# EAGLE board driver_board (EAGLE 9.1.3)
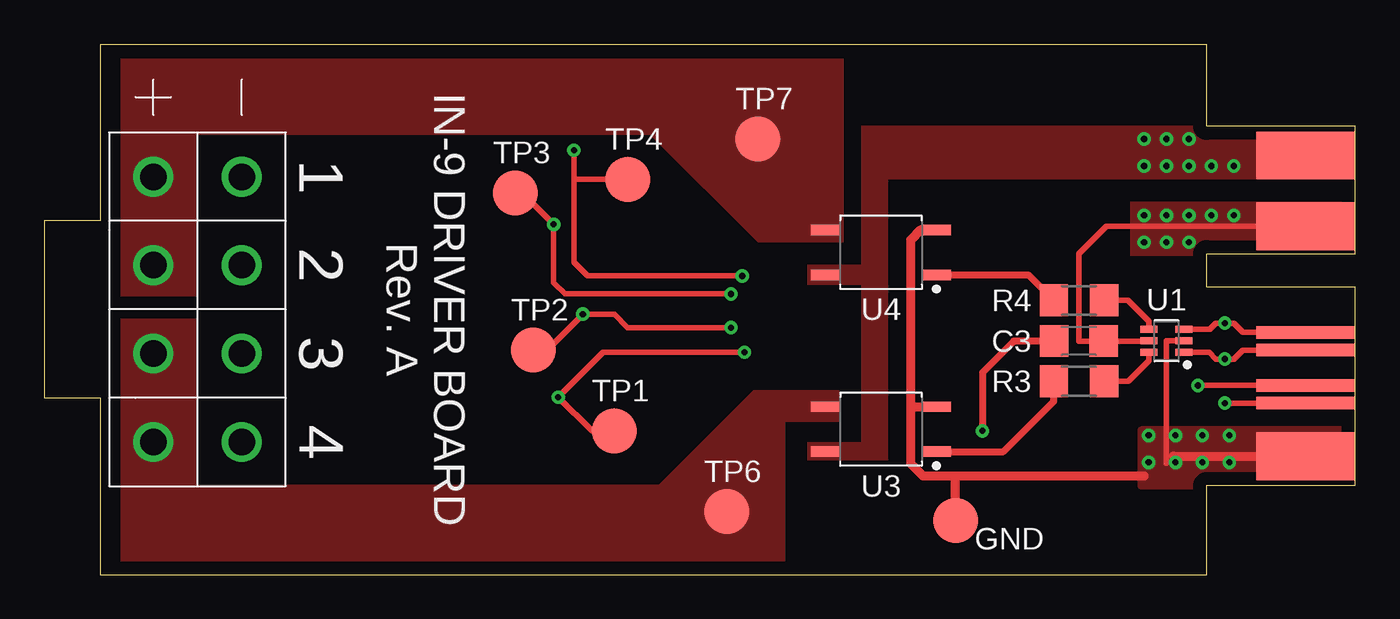
[diagram p0: board, top side]
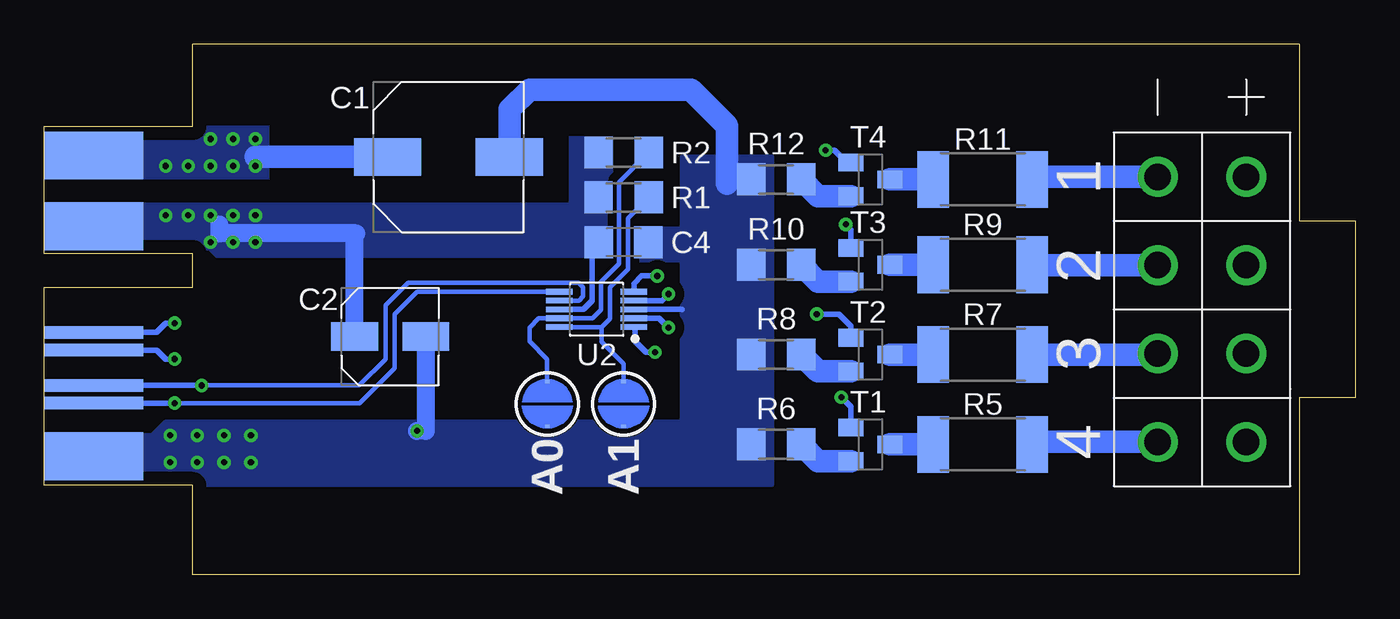
[diagram p1: board, bottom side, seen from below]

Size 74.17 x 30 mm. Coordinates in mm from the lower left corner, seen from the top.
Outline: 3.17,30 65.78,30 65.78,25.35 74.17,25.35 74.17,18.15 65.78,18.15 65.78,16.25 74.17,16.25 74.17,5.05 65.78,5.05 65.78,0 3.17,0 3.17,10 0,10 0,20 3.17,20 3.17,30
Copper layers (1*16): Top 0.035mm / dielectric 1.5mm / Bottom 0.035mm
Design rules "default *": minimum track width 6mil, minimum drill 0.35mm, track to track 6mil, track to pad 6mil, pad to pad 6mil, via to via 6mil, smd to smd 6mil, copper to edge 30mil, drill to drill 6mil, minimum pad ring 10mil, minimum via ring 8mil, stop-mask expansion 4mil, vias tented up to drill 20mil, thermal gap 10mil

## Footprints (pad centres in the part's own frame; a part is rotated, then mirrored left to right if it is on the bottom)
SMT-JUMPER_2_NO_SILK_ROUND = smd 0.152 x 0.305: 1 -1.27,0; 2 1.27,0
CAPAE830X1030 = smd 3.81 x 2.12: 1 -3.449,0; 2 3.449,0
CAPAE530X550 = smd 2.637 x 1.62: 1 -2.013,0; 2 2.013,0
C1206 = smd 1.6 x 1.8: 1 -1.4,0; 2 1.4,0
PCIE_EDGE = smd 2.7 x 5.6: 5V1 19.7,-5.6; GND1 6.7,-5.6; HV1 23.7,-5.6 | smd 2.7 x 5.6 bottom: 5V2 19.7,-5.6; GND2 6.7,-5.6; HV2 23.7,-5.6 | smd 0.7 x 5.6: SCL1 9.7,-5.6; SDA1 10.7,-5.6; TMR1_1 12.7,-5.6; TMR2_1 13.7,-5.6 | smd 0.7 x 5.6 bottom: SCL2 9.7,-5.6; SDA2 10.7,-5.6; TMR1_2 12.7,-5.6; TMR2_2 13.7,-5.6
POWER_EDGE = drill 1.5: A1 3,7.5; A2 3,12.5; A3 3,17.5; A4 3,22.5; C1 8,7.5; C2 8,12.5; C3 8,17.5; C4 8,22.5
R1206 = smd 1.6 x 1.803: 1 -1.422,0; 2 1.422,0
R2512 = smd 1.8 x 3.2: 1 -2.8,0; 2 2.8,0
SOT23-BEC = smd 1 x 1.4: B -0.95,-1.1; C 0,1.1; E 0.95,-1.1
B2,54 = smd 2.54 x 2.54: TP 0,0
SOP65P210X100-6 = smd 0.96 x 0.397: 1 -0.985,0.65; 2 -0.985,0; 3 -0.985,-0.65; 4 0.985,-0.65; 5 0.985,0; 6 0.985,0.65
SOP50P490X110-10 = smd 1.503 x 0.322: 1 -2.104,1; 2 -2.104,0.5; 3 -2.104,0; 4 -2.104,-0.5; 5 -2.104,-1; 6 2.104,-1; 7 2.104,-0.5; 8 2.104,0; 9 2.104,0.5; 10 2.104,1
SOP254P675X220-4 = smd 1.568 x 0.589: 1 -3.17,1.27; 2 -3.17,-1.27; 3 3.17,-1.27; 4 3.17,1.27

## Placement (x,y rotation side)
A0  JUMPER-SMT_2_NO_SILK_ROUND  [SMT-JUMPER_2_NO_SILK_ROUND]  45.72,9.65 90 bottom
A1  JUMPER-SMT_2_NO_SILK_ROUND  [SMT-JUMPER_2_NO_SILK_ROUND]  41.4,9.65 90 bottom
C1  3.9uF  [CAPAE830X1030]  51.31,23.62 0 bottom
C2  100uF  [CAPAE530X550]  54.61,13.46 0 bottom
C3  1uF  [C1206]  58.55,13.21 180 top
C4  1uF  [C1206]  41.4,18.8 180 bottom
J1  PCIE_EDGE  [PCIE_EDGE]  65.79,0 90 top
JP3  POWER_EDGE  [POWER_EDGE]  3.17,0 0 top
R1  10k  [R1206]  41.4,21.34 180 bottom
R2  10k  [R1206]  41.4,23.88 180 bottom
R3  360  [R1206]  58.55,10.94 180 top
R4  360  [R1206]  58.55,15.51 180 top
R5  3.3k  [R2512]  21.08,7.37 0 bottom
R6  200  [R1206]  32.77,7.37 0 bottom
R7  3.3k  [R2512]  21.08,12.45 0 bottom
R8  200  [R1206]  32.77,12.45 0 bottom
R9  3.3k  [R2512]  21.08,17.53 0 bottom
R10  200  [R1206]  32.77,17.53 0 bottom
R11  3.3k  [R2512]  21.08,22.35 0 bottom
R12  200  [R1206]  32.77,22.35 0 bottom
T1  [SOT23-BEC]  27.43,7.37 270 bottom
T2  [SOT23-BEC]  27.43,12.45 270 bottom
T3  [SOT23-BEC]  27.43,17.53 270 bottom
T4  [SOT23-BEC]  27.43,22.35 270 bottom
TP1  TPB2,54  [B2,54]  32.26,8.13 0 top
TP2  TPB2,54  [B2,54]  27.69,12.7 0 top
TP3  TPB2,54  [B2,54]  26.67,21.59 0 top
TP4  TPB2,54  [B2,54]  33.02,22.35 0 top
TP5  TPB2,54  [B2,54]  51.56,3.05 0 top
TP6  TPB2,54  [B2,54]  38.61,3.56 0 top
TP7  TPB2,54  [B2,54]  40.39,24.64 0 top
U1  TC7PZ17FU  [SOP65P210X100-6]  63.5,13.22 180 top
U2  DAC5574  [SOP50P490X110-10]  42.93,15 180 bottom
U3  LTV-352T  [SOP254P675X220-4]  47.35,8.22 180 top
U4  LTV-352T  [SOP254P675X220-4]  47.35,18.22 180 top

## Library data of the parts
A0 A1 = SparkFun-Jumpers
C1 C2 J1 JP3 U1-U4 = tide_clock
C3 C4 R1-R12 = resistor
T1-T4 = transistor
TP1-TP7 = testpad

## Nets
+5V: C2.1 C3.1 C4.2 J1.5V1 J1.5V2 R1.2 R2.2 U1.5 U2.8
GND: A0.1 A1.1 C1.2 C2.2 C3.2 C4.1 J1.GND1 J1.GND2 R6.1 R8.1 R10.1 R12.1 TP5.TP U1.2 U2.3 U3.2 U4.2
N$3: R3.2 U3.1
N$4: R4.2 U4.1
N$5: R3.1 U1.6
N$6: R4.1 U1.4
N$7: JP3.A3 JP3.A4 TP7.TP U4.3
N$8: JP3.A1 JP3.A2 TP6.TP U3.3
N$9: JP3.C1 R5.2
N$11: JP3.C2 R7.2
N$12: JP3.C3 R9.2
N$13: JP3.C4 R11.2
N$14: R5.1 T1.C
N$15: R7.1 T2.C
N$16: R9.1 T3.C
N$17: R11.1 T4.C
N$18: R6.2 T1.E
N$19: R8.2 T2.E
N$20: R10.2 T3.E
N$21: R12.2 T4.E
N$22: T1.B TP1.TP U2.1
N$23: T2.B TP2.TP U2.2
N$24: T3.B TP3.TP U2.4
N$25: T4.B TP4.TP U2.5
N$26: A0.2 R2.1 U2.9
N$27: A1.2 R1.1 U2.10
SCL: J1.SCL1 J1.SCL2 U2.6
SDA: J1.SDA1 J1.SDA2 U2.7
TMR1: J1.TMR1_1 J1.TMR1_2 U1.1
TMR2: J1.TMR2_1 J1.TMR2_2 U1.3
V+: C1.1 J1.HV1 J1.HV2 U3.4 U4.4

## Tracks (layer width: path | path; a pad name or v marks a point on that pad's centre or on a via)
+5V  (via drill 0.35)
  Top 0.305: U1.5 62.5,13.21 C3.1 58.55,13.21 58.55,18.16 60.09,19.7 J1.5V1
  Bottom 0.305: C4.2 43.18,18.42 43.18,15.49 43.67,15 U2.8
  Bottom 1.016: 64.26,19.81 64.26,19.3 56.53,19.3 56.62,19.28 C2.1
  other vias: 62.23,20.32 62.23,18.8 63.5,20.32 63.5,18.8 64.77,18.8 64.77,20.32 66.04,20.32 67.31,20.32
  pour Bottom (isolate 0.508, no thermals): 42.01,17.93 64.47,17.93 64.87,18.34 74.07,18.34 74.07,21.03 44.5,21.03 44.5,24.79 42.01,24.79
  pour Top (no thermals): 61.47,21.08 61.47,18.03 74.17,18.03 74.17,21.08
GND  (via drill 0.35)
  Top 0.305: U1.2 63.5,13.22 63.5,6.29
  Top 0.406: C3.2 54.86,13.21 53.09,11.43 v53.09,8.13
  Top 0.508: 63.91,6.7 J1.GND1 | U4.2 49.59,19.49 49.02,18.92 49.02,9.49 | 49.02,9.49 U3.2 | 49.02,9.49 49.02,6.29 49.73,5.59 51.56,5.59 | 51.56,5.59 62.23,5.59 | TP5.TP 51.56,5.59
  Bottom 0.305: U2.3 38.1,15 38.1,14.99
  Bottom 1.016: C2.2 52.6,8.13 v53.09,8.13
  Bottom 1.27: C1.2 47.86,26.31 46.74,27.43 37.59,27.43 35.56,25.4 35.56,22.1
  other vias: 62.48,7.87 62.48,6.35 64.01,7.87 65.53,7.87 64.01,6.35 65.53,6.35 67.06,7.87 67.06,6.35
  pour Bottom (isolate 0.508, no thermals): 33.02,23.62 38.1,23.62 38.1,19.56 40.64,19.56 40.64,17.78 38.1,17.78 38.1,8.64 67.31,8.64 68.07,7.87 74.17,7.87 74.17,5.08 65.79,5.08 33.02,5.08
  pour Top (isolate 0.508, no thermals): 65.79,5.08 74.17,5.08 74.17,8.13 62.1,8.13 62.1,5.08
N$3
  Top 0.406: U3.1 54.28,6.95 57.12,9.79 R3.2
N$4
  Top 0.406: U4.1 55.68,16.95 R4.2
N$5
  Top 0.305: R3.1 61.35,10.94 62.52,12.1 U1.6
N$6
  Top 0.305: R4.1 61.33,15.51 62.52,14.32 U1.4
N$7
  pour Top (no thermals): 4.32,15.75 7.87,15.75 8.64,15.75 8.64,24.89 34.29,24.89 40.39,18.8 45.21,18.8 45.21,20.32 45.21,29.21 5.33,29.21 4.32,29.21
N$8
  pour Top (no thermals): 4.32,14.48 8.64,14.48 8.64,5.08 34.8,5.08 40.13,10.41 44.96,10.41 44.96,8.64 41.91,8.64 41.91,6.6 41.91,0.25 5.59,0.25 4.32,0.25
N$9
  Bottom 1.27: JP3.C1 18.28,7.5 R5.2
N$11
  Bottom 1.27: JP3.C2 11.18,12.45 R7.2
N$12
  Bottom 1.27: 17.88,17.5 17.88,17.53 R9.2 18.28,17.5 JP3.C3
N$13
  Bottom 1.27: JP3.C4 18.28,22.5 R11.2
N$14
  Bottom 1.27: R5.1 T1.C
N$15
  Bottom 1.27: R7.1 T2.C
N$16
  Bottom 1.27: R9.1 T3.C
N$17
  Bottom 1.27: R11.1 T4.C
N$18
  Bottom 1.27: T1.E 30.39,6.42 R6.2
N$19
  Bottom 1.27: T2.E 30.39,11.5 R8.2
N$20
  Bottom 1.27: T3.E 30.39,16.58 R10.2
N$21
  Bottom 1.27: T4.E 30.39,21.4 R12.2
N$22  (via drill 0.35)
  Top 0.305: v39.62,12.57 31.62,12.57 v29.08,10.03 30.99,8.13 TP1.TP
  Bottom 0.305: U2.1 40.77,13.95 40.77,13.21 40.13,12.57 v39.62,12.57 | T1.B 28.53,9.48 v29.08,10.03
N$23  (via drill 0.35)
  Top 0.305: v38.86,13.97 33.02,13.97 32.26,14.73 v30.48,14.73 28.45,12.7 TP2.TP
  Bottom 0.305: U2.2 39.39,14.5 v38.86,13.97 | v30.48,14.73 29.21,14.73 28.53,14.05 T2.B
N$24  (via drill 0.35)
  Top 0.305: v38.86,15.88 29.46,15.88 28.83,16.51 v28.83,19.81 27.05,21.59 TP3.TP
  Bottom 0.305: U2.4 39.24,15.5 v38.86,15.88 | T3.B 28.53,19.52 v28.83,19.81
N$25  (via drill 0.35)
  Top 0.305: v39.5,16.89 30.73,16.89 29.97,17.65 29.97,22.35 | 29.97,22.35 v29.97,24 | TP4.TP 29.97,22.35
  Bottom 0.305: U2.5 40.82,16.46 40.39,16.89 v39.5,16.89 | T4.B 28.76,23.3 29.46,24 v29.97,24
N$26
  Bottom 0.254: R2.1 41.66,22.2 41.66,17.59 42.67,16.58 42.67,14.99 43.16,14.5 U2.9 46.21,14.5 46.74,13.97 46.74,13.21 45.72,12.19 A0.2
N$27
  Bottom 0.254: R1.1 41.15,20.17 41.15,17.27 42.16,16.26 42.16,14.48 42.64,14 | 42.64,14 U2.10 | 42.64,14 42.64,13.18 41.4,11.94 A1.2
SCL  (via drill 0.35)
  Top 0.305: J1.SCL2 v66.8,9.7
  Bottom 0.254: v66.8,9.7 56.34,9.7 54.36,11.68 54.36,14.73 53.09,16 U2.6
  Bottom 0.305: J1.SCL2 v66.8,9.7
SDA  (via drill 0.35)
  Top 0.305: J1.SDA2 v65.28,10.7
  Bottom 0.254: v65.28,10.7 56.36,10.7 54.86,12.19 54.86,15.24 53.59,16.51 43.94,16.51 43.69,16.26 43.69,15.75 43.94,15.5 U2.7
  Bottom 0.305: J1.SDA2 v65.28,10.7
TMR1  (via drill 0.35)
  Top 0.305: U1.1 65.91,12.57 66.29,12.19 v66.8,12.19 67.31,12.19 67.82,12.7 J1.TMR1_1
  Bottom 0.305: v66.8,12.19 67.31,12.19 67.82,12.7 J1.TMR1_1
TMR2  (via drill 0.35)
  Top 0.305: U1.3 65.94,13.87 66.29,14.22 v66.8,14.22 67.31,14.22 67.82,13.72 71.37,13.72 J1.TMR2_2
  Bottom 0.305: v66.8,14.22 67.31,14.22 67.83,13.7 J1.TMR2_2
V+  (via drill 0.35)
  Bottom 1.27: C1.1 62.23,23.62
  other vias: 62.23,24.64 62.23,23.11 63.5,24.64 63.5,23.11 64.77,24.64 64.77,23.11 66.04,23.11 67.31,23.11
  pour Bottom (no thermals): 61.47,22.35 74.17,22.35 74.17,25.4 61.47,25.4
  pour Top (isolate 0.508, no thermals): 43.18,7.37 43.18,6.48 47.75,6.48 47.75,22.35 74.17,22.35 74.17,25.4 46.23,25.4 46.23,17.53 43.18,17.53 43.18,16.38 46.23,16.38 46.23,7.49 43.18,7.49

## Text on the board
tNames: IN-9 DRIVER BOARD / Rev. A | GND